# Altium PCB Dout32x.PcbDoc
Units mil, origin at the board's own origin, x right, y up, seen from the top; angles counter-clockwise.
Board outline 3700.79 x 1181.1 mil, 2 copper layers (Top Layer, Bottom Layer); 23 components, 75 nets, 198 pads, 0 vias.
Unrouted connection lines stored in the file: 77.
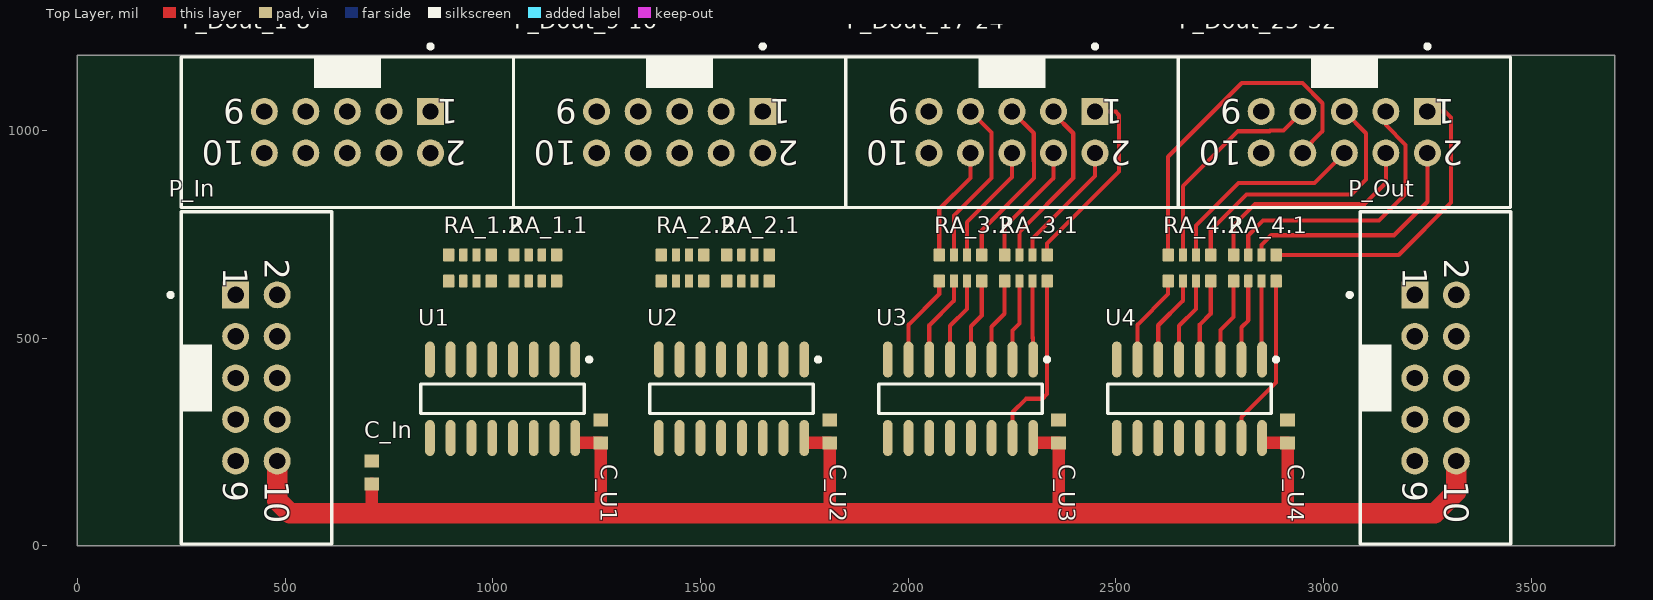
[diagram p0: Top Layer view]
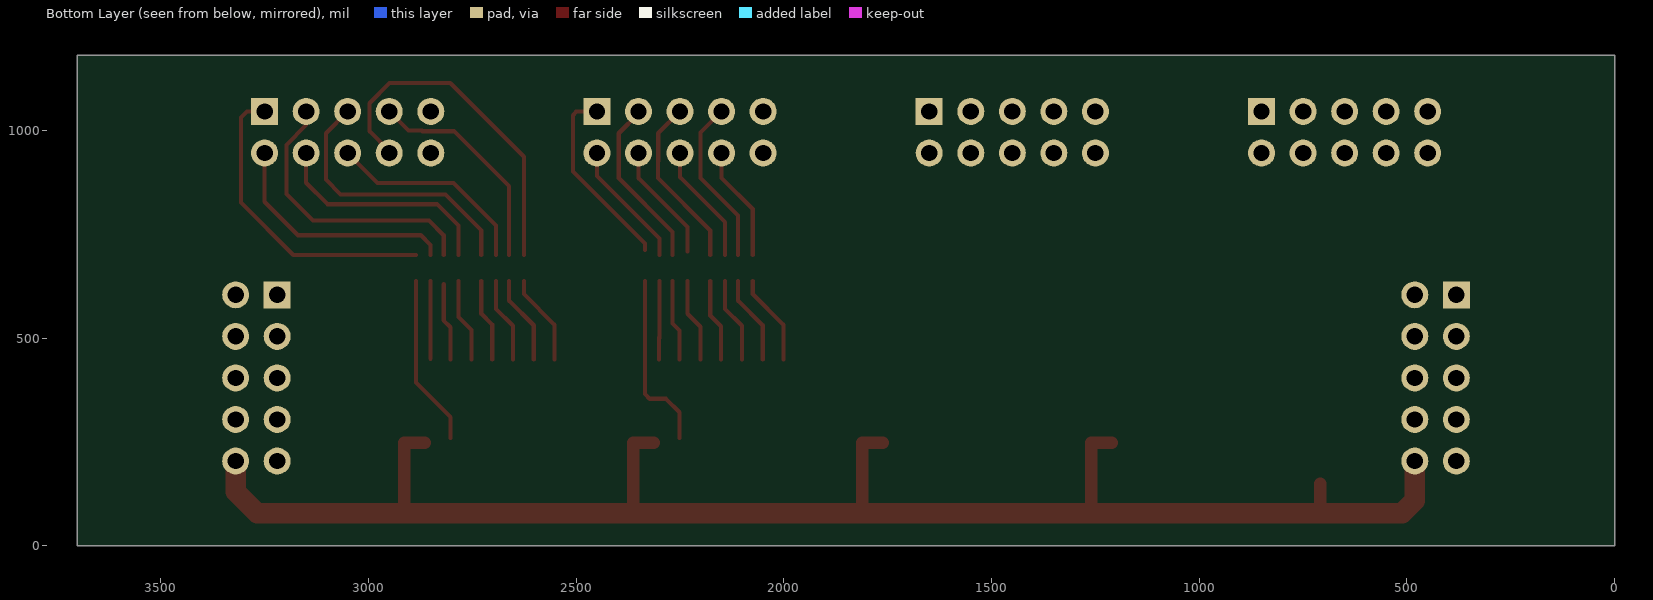
[diagram p1: Bottom Layer view, seen from below]

## Layer stack, top to bottom
Top Layer: signal copper 1.4
Dielectric: core 12.6, FR-4, Dk 4.8
Bottom Layer: signal copper 1.4

## Board outline
0,0 0,1181.1 3700.79,1181.1 3700.79,0 3685.04,0

## Design rules (kind name [scope] priority, off if disabled: settings)
Clearance [All] p1: gap=10
ComponentClearance [All] p1 off: gap=0 collisioncheckmode=3 verticalgap=10 showdistances=FALSE
PolygonConnect [All] p1: connectstyle=Relief reliefconductorwidth=10 reliefentries=4 polygonreliefangle="90 Angle" airgapwidth=10
RoutingVias [All] p1: holewidth=28 width=50 viastyle="Through Hole" minholewidth=28 minwidth=50 maxholewidth=28 maxwidth=50
SilkscreenOverComponentPads [All] p1: minsilkscreentomaskgap=10
SolderMaskExpansion [All] p1: expansion=4
Width [All] p1: maxlimit=100 minlimit=10 preferedwidth=10
26 further rules are at their usual default settings.

## Components (designator, comment, footprint, x,y, rotation, side; value= is the part's Value field where it differs from the comment)
C_In "Cap Semi" 1608[0603] 708.66,177.17 r270 top
C_U1 "Cap Semi" 1608[0603] 1259.84,275.59 r270 top
C_U2 "Cap Semi" 1608[0603] 1811.02,275.59 r270 top
C_U3 "Cap Semi" 1608[0603] 2362.2,275.59 r270 top
C_U4 "Cap Semi" 1608[0603] 2913.39,275.59 r270 top
P_Dout_1-8 "10 pol" 918510x324 650,996.06 r180 top
P_Dout_9-16 "10 pol" 918510x324 1450,996.06 r180 top
P_Dout_17-24 "10 pol" 918510x324 2250,996.06 r180 top
P_Dout_25-32 "10 pol" 918510x324 3050,996.06 r180 top
P_In "10 pol" 918510x324 431.1,404.53 r270 top
P_Out "10 pol" 918510x324 3269.69,404.53 r270 top
RA_1.1 "EXB38" EXB38 1102.36,669.29 r180 top
RA_1.2 "EXB38" EXB38 944.88,669.29 r180 top
RA_2.1 "EXB38" EXB38 1614.17,669.29 r180 top
RA_2.2 "EXB38" EXB38 1456.69,669.29 r180 top
RA_3.1 "EXB38" EXB38 2283.46,669.29 r180 top
RA_3.2 "EXB38" EXB38 2125.98,669.29 r180 top
RA_4.1 "EXB38" EXB38 2834.65,669.29 r180 top
RA_4.2 "EXB38" EXB38 2677.17,669.29 r180 top
U1 "SN74HC595D" D016_N 1023.62,354.33 r270 top
U2 "SN74HC595D" D016_N 1574.8,354.33 r270 top
U3 "SN74HC595D" D016_N 2125.98,354.33 r270 top
U4 "SN74HC595D" D016_N 2677.17,354.33 r270 top

## Footprints (in the part's own frame and the unit in brackets; to place one, negate y for a bottom-side part, rotate by r counter-clockwise, add the part's x,y. Pads: shape width x height; smd on the part's side, far side on the other; paste and mask are expansions set on the pad)
1608[0603] [mm] "Chip Capacitor, Body 1.6x0.8mm, IPC High Density"
  rect 0.8x0.9 smd: 1(-0.7,0) 2(0.7,0)
  body extent -0.87,-0.48 0.87,0.48, height 1.3
918510x324 [mm] "Connector; IDC, Low Profile Male Header, Thru-Hole; 10 Position; Vertical; Pitch 2.54 mm; Body 20.32 x 9.2 x 9.45 mm (LxWxH)"
  rect 1.65x1.65 hole 1: 1(-5.08,-1.27)
  round 1.65 hole 1: 2(-5.08,1.27) 3(-2.54,-1.27) 4(-2.54,1.27) 5(0,-1.27) 6(0,1.27) 7(2.54,-1.27) 8(2.54,1.27) 9(5.08,-1.27) 10(5.08,1.27)
  silkscreen extent -10.16,-5.37 10.16,4.6
D016_N [mm] "SOIC, 16-Leads, Body 9.9x3.9mm, Pitch 1.27mm, IPC Medium Density"
  oval 2.2x0.6 smd: 1(-2.4,4.445) 2(-2.4,3.175) 3(-2.4,1.905) 4(-2.4,0.635) 5(-2.4,-0.635) 6(-2.4,-1.905) 7(-2.4,-3.175) 8(-2.4,-4.445) 9(2.4,-4.445) 10(2.4,-3.175) 11(2.4,-1.905) 12(2.4,-0.635) 13(2.4,0.635) 14(2.4,1.905) 15(2.4,3.175) 16(2.4,4.445)
  silkscreen extent -2.52,-5 0.9,5.42, body extent -1.95,-4.95 1.95,4.95, height 1.75
EXB38 [mm]
  rrect20% 0.7x0.8 smd: 1(-1.3,-0.8) 4(1.3,-0.8) 5(1.3,0.8) 8(-1.3,0.8)
  rrect20% 0.5x0.8 smd: 2(-0.4,-0.8) 3(0.4,-0.8) 6(0.4,0.8) 7(-0.4,0.8)

## Part data
C_In C_U1 C_U2 C_U3 C_U4: "Capacitor (Semiconductor SIM Model)"
P_Dout_1-8 P_Dout_9-16 P_Dout_17-24 P_Dout_25-32 P_In P_Out: library part "09 18 510 6324", "Flat Cable Connector (IDC), Low-Profile Male Header, Straight Solder Pin, 10 Contacts, Performance Level 2"
RA_1.1 RA_1.2 RA_2.1 RA_2.2 RA_3.1 RA_3.2 RA_4.1 RA_4.2: library part "4 Resistors Parallel"
U1 U2 U3 U4: "8-Bit Shift Register with 3-State Output Registers"

## Nets (pads, with @x,y where several pads share a name; then routed paths per layer and width w, separated by ;. In a path a pad name is that pad's centre, name@x,y a point inside that pad or via, vN(x,y) a via of type N, cw(c..) or ccw(c..) an arc to the next point about the centre after c; other vN are vias at no path point)
CL: P_In.1 P_Out.1 U1.11 U2.11 U3.11 U4.11
GND: C_In.1 C_U1.1 C_U2.1 C_U3.1 C_U4.1 P_Dout_1-8.9 P_Dout_9-16.9 P_Dout_17-24.9 P_Dout_25-32.9 P_In.2 P_In.4 P_In.6 P_In.9 P_Out.2 P_Out.4 P_Out.6 P_Out.9 U1.8 U1.13 U2.8 U2.13 U3.8 U3.13 U4.8 U4.13
ID: P_In.5 P_Out.5
IG: P_In.8 P_Out.8
NetRA_1.1_5: RA_1.1.5 U1.3
NetRA_1.1_6: RA_1.1.6 U1.2
NetRA_1.1_7: RA_1.1.7 U1.1
NetRA_1.1_8: RA_1.1.8 U1.15
NetRA_1.2_5: RA_1.2.5 U1.7
NetRA_1.2_6: RA_1.2.6 U1.6
NetRA_1.2_7: RA_1.2.7 U1.5
NetRA_1.2_8: RA_1.2.8 U1.4
NetRA_2.1_5: RA_2.1.5 U2.3
NetRA_2.1_6: RA_2.1.6 U2.2
NetRA_2.1_7: RA_2.1.7 U2.1
NetRA_2.1_8: RA_2.1.8 U2.15
NetRA_2.2_5: RA_2.2.5 U2.7
NetRA_2.2_6: RA_2.2.6 U2.6
NetRA_2.2_7: RA_2.2.7 U2.5
NetRA_2.2_8: RA_2.2.8 U2.4
NetRA_3.1_5: RA_3.1.5 U3.3 | length 201.9
  Top Layer w10: U3.3 2200.98,527.76 2232.28,559.06 RA_3.1.5
NetRA_3.1_6: RA_3.1.6 U3.2 | length 195.9
  Top Layer w10: U3.2 2250.98,518.7 2267.72,535.43 RA_3.1.6
NetRA_3.1_7: RA_3.1.7 U3.1 | length 193.3
  Top Layer w10: RA_3.1.7 2299.21,500 2300.98,501.77 U3.1
NetRA_3.1_8: RA_3.1.8 U3.15 | length 435.7
  Top Layer w10: U3.15 2250.98,321.85 2283.46,354.33 2322.83,354.33 2334.65,366.14 RA_3.1.8
NetRA_3.2_5: RA_3.2.5 U3.7 | length 219.6
  Top Layer w10: U3.7 2000.98,532.48 2074.8,606.3 RA_3.2.5
NetRA_3.2_6: RA_3.2.6 U3.6 | length 213.5
  Top Layer w10: U3.6 2050.98,531.3 2110.24,590.55 RA_3.2.6
NetRA_3.2_7: RA_3.2.7 U3.5 | length 205.9
  Top Layer w10: U3.5 2100.98,530.12 2141.73,570.87 RA_3.2.7
NetRA_3.2_8: RA_3.2.8 U3.4 | length 199.8
  Top Layer w10: U3.4 2150.98,528.94 2177.17,555.12 RA_3.2.8
NetRA_4.1_5: RA_4.1.5 U4.3 | length 201.9
  Top Layer w10: U4.3 2752.17,519.88 2783.46,551.18 RA_4.1.5
NetRA_4.1_6: RA_4.1.6 U4.2 | length 188
  Top Layer w10: U4.2 2802.17,526.57 2818.9,543.31 RA_4.1.6@2818.9,629.92
NetRA_4.1_7: RA_4.1.7 U4.1 | length 187.2
  Top Layer w10: U4.1@2850.39,450.59 RA_4.1.7
NetRA_4.1_8: RA_4.1.8 U4.15 | length 412.6
  Top Layer w10: U4.15 2802.17,310.04 2885.83,393.7 RA_4.1.8
NetRA_4.2_5: RA_4.2.5 U4.7 | length 219.6
  Top Layer w10: U4.7 2552.17,532.48 2625.98,606.3 RA_4.2.5
NetRA_4.2_6: RA_4.2.6 U4.6 | length 213.5
  Top Layer w10: U4.6 2602.17,531.3 2661.42,590.55 RA_4.2.6
NetRA_4.2_7: RA_4.2.7 U4.5 | length 205.9
  Top Layer w10: U4.5 2652.17,530.12 2692.91,570.87 RA_4.2.7
NetRA_4.2_8: RA_4.2.8 U4.4 | length 199.8
  Top Layer w10: U4.4 2702.17,532.87 2728.35,559.06 RA_4.2.8
OD: P_In.3 U1.14
OD_1: U1.9 U2.14
OD_2: U2.9 U3.14
OD_3: U3.9 U4.14
OD_4: P_Out.3 U4.9
OS: P_In.7 P_Out.7 U1.12 U2.12 U3.12 U4.12
OUT_1.1: P_Dout_1-8.1 RA_1.1.1
OUT_1.2: P_Dout_1-8.2 RA_1.1.2
OUT_1.3: P_Dout_1-8.3 RA_1.1.3
OUT_1.4: P_Dout_1-8.4 RA_1.1.4
OUT_1.5: P_Dout_1-8.5 RA_1.2.1
OUT_1.6: P_Dout_1-8.6 RA_1.2.2
OUT_1.7: P_Dout_1-8.7 RA_1.2.3
OUT_1.8: P_Dout_1-8.8 RA_1.2.4
OUT_2.1: P_Dout_9-16.1 RA_2.1.1
OUT_2.2: P_Dout_9-16.2 RA_2.1.2
OUT_2.3: P_Dout_9-16.3 RA_2.1.3
OUT_2.4: P_Dout_9-16.4 RA_2.1.4
OUT_2.5: P_Dout_9-16.5 RA_2.2.1
OUT_2.6: P_Dout_9-16.6 RA_2.2.2
OUT_2.7: P_Dout_9-16.7 RA_2.2.3
OUT_2.8: P_Dout_9-16.8 RA_2.2.4
OUT_3.1: P_Dout_17-24.1 RA_3.1.1 | length 458.5
  Top Layer w10: RA_3.1.1@2334.65,712.6 2334.65,728.35 2507.87,901.57 2507.87,1037.01 2500,1044.88 2500,1046.06 P_Dout_17-24.1
OUT_3.2: P_Dout_17-24.2 RA_3.1.2 | length 307.7
  Top Layer w10: RA_3.1.2 2299.21,740.16 2450,890.94 P_Dout_17-24.2
OUT_3.3: P_Dout_17-24.3 RA_3.1.3 | length 418.7
  Top Layer w10: RA_3.1.3 2267.72,755.91 2397.48,885.67 2397.48,993.54 2350,1041.02 P_Dout_17-24.3
OUT_3.4: P_Dout_17-24.4 RA_3.1.4 | length 286.2
  Top Layer w10: RA_3.1.4@2232.28,708.66 2232.28,767.72 2350,885.43 P_Dout_17-24.4
OUT_3.5: P_Dout_17-24.5 RA_3.2.1 | length 419.5
  Top Layer w10: RA_3.2.1 2177.17,759.84 2303.15,885.83 2303.15,925.77 2302.52,926.4 2302.52,993.54 P_Dout_17-24.5
OUT_3.6: P_Dout_17-24.6 RA_3.2.2 | length 290.1
  Top Layer w10: RA_3.2.2 2141.73,779.53 2250,887.8 P_Dout_17-24.6
OUT_3.7: P_Dout_17-24.7 RA_3.2.3 | length 403.8
  Top Layer w10: RA_3.2.3 2110.24,795.28 2200.79,885.83 2200.79,995.28 P_Dout_17-24.7
OUT_3.8: P_Dout_17-24.8 RA_3.2.4 | length 276.4
  Top Layer w10: RA_3.2.4 2074.8,811.02 2150,886.22 P_Dout_17-24.8
OUT_4.1: P_Dout_25-32.1 RA_4.1.1 | length 741.3
  Top Layer w10: RA_4.1.1 3181.1,700.79 3307.09,826.77 3307.09,1031.5 3292.52,1046.06 P_Dout_25-32.1
OUT_4.2: P_Dout_25-32.2 RA_4.1.2 | length 583.8
  Top Layer w10: RA_4.1.2 2850.39,724.41 2874.02,748.03 3169.29,748.03 3250,828.74 P_Dout_25-32.2
OUT_4.3: P_Dout_25-32.3 RA_4.1.3 | length 685.5
  Top Layer w10: RA_4.1.3 2818.9,748.03 2854.33,783.46 3133.86,783.46 3197.48,847.09 3197.48,965.73 3150,1013.21 P_Dout_25-32.3
OUT_4.4: P_Dout_25-32.4 RA_4.1.4 | length 551.6
  Top Layer w10: RA_4.1.4 2783.46,771.65 2834.65,822.83 3098.43,822.83 3150,874.41 P_Dout_25-32.4
OUT_4.5: P_Dout_25-32.5 RA_4.2.1 | length 669.5
  Top Layer w10: RA_4.2.1 2728.35,759.84 2814.96,846.46 3066.93,846.46 3102.36,881.89 3102.36,993.7 P_Dout_25-32.5
OUT_4.6: P_Dout_25-32.6 RA_4.2.2 | length 500.2
  Top Layer w10: RA_4.2.2 2692.91,771.65 2795.28,874.02 2977.95,874.02 P_Dout_25-32.6
OUT_4.7: P_Dout_25-32.7 RA_4.2.3 | length 528.5
  Top Layer w10: RA_4.2.3 2661.42,866.14 2793.86,998.58 2869.67,998.58 2871.08,1000 2903.94,1000 P_Dout_25-32.7
OUT_4.8: P_Dout_25-32.8 RA_4.2.4 | length 835.5
  Top Layer w10: RA_4.2.4 2625.98,937.01 2803.15,1114.17 2949.04,1114.17 2997.48,1065.73 2997.48,998.58 P_Dout_25-32.8@2950,951.1
VCC: C_In.2 C_U1.2 C_U2.2 C_U3.2 C_U4.2 P_In.10 P_Out.10 U1.10 U1.16 U2.10 U2.16 U3.10 U3.16 U4.10 U4.16 | length 3987.4
  Top Layer w30: 708.66,78.74 C_In.2 ; 1210.43,248.03 C_U1.2 1259.84,78.74 ; U2.16@1761.61,248.03 C_U2.2 1811.02,78.74 ; 2312.8,248.03 C_U3.2 2362.2,78.74 ; 2863.98,248.03 C_U4.2 2913.39,78.74
  Top Layer w50: P_In.10 481.1,109.45 511.81,78.74 1259.84,78.74 1811.02,78.74 3267.72,78.74 3319.69,130.71 P_Out.10
pads on no net: P_Dout_1-8.10 P_Dout_9-16.10 P_Dout_17-24.10 P_Dout_25-32.10

## Silkscreen, mask and mechanical layers (free items; w line width, h text height)
Mechanical 1:
  circle w3.94: c3582.68,196.85 r53.15
  circle w3.94: c3582.68,984.25 r53.15
  circle w3.94: c118.11,984.25 r53.15
  circle w3.94: c118.11,196.85 r53.15
  lines w3.94: 236.22,0 236.22,1181.1 ; 3464.57,0 3464.57,1181.1 ; 0,0 3700.79,0 3700.79,1181.1 39.37,1181.1 0,1181.1 0,0

## Text inside footprints (layer, text, board x,y; h text height)
P_Dout_1-8: Top Overlay "9" at 402.76,1075.59 h59.06 r180; Top Overlay "10" at 402.76,975.59 h59.06 r180; Top Overlay "1" at 916.92,1075.59 h59.06 r180; Top Overlay "2" at 936.6,975.59 h59.06 r180
P_Dout_9-16: Top Overlay "9" at 1202.76,1075.59 h59.06 r180; Top Overlay "10" at 1202.76,975.59 h59.06 r180; Top Overlay "1" at 1716.92,1075.59 h59.06 r180; Top Overlay "2" at 1736.6,975.59 h59.06 r180
P_Dout_17-24: Top Overlay "9" at 2002.76,1075.59 h59.06 r180; Top Overlay "10" at 2002.76,975.59 h59.06 r180; Top Overlay "1" at 2516.92,1075.59 h59.06 r180; Top Overlay "2" at 2536.6,975.59 h59.06 r180
P_Dout_25-32: Top Overlay "9" at 2802.76,1075.59 h59.06 r180; Top Overlay "10" at 2802.76,975.59 h59.06 r180; Top Overlay "1" at 3316.92,1075.59 h59.06 r180; Top Overlay "2" at 3336.6,975.59 h59.06 r180
P_In: Top Overlay "9" at 351.57,157.28 h59.06 r270; Top Overlay "10" at 451.57,157.28 h59.06 r270; Top Overlay "1" at 351.57,671.45 h59.06 r270; Top Overlay "2" at 451.57,691.13 h59.06 r270
P_Out: Top Overlay "9" at 3190.16,157.28 h59.06 r270; Top Overlay "10" at 3290.16,157.28 h59.06 r270; Top Overlay "1" at 3190.16,671.45 h59.06 r270; Top Overlay "2" at 3290.16,691.13 h59.06 r270